# Altium PCB SonarControl.PcbDoc
Units mil, origin at the board's own origin, x right, y up, seen from the top; angles counter-clockwise.
Board outline 1500 x 2220 mil, 2 copper layers (Top Layer, Bottom Layer); 15 components, 0 nets, 85 pads, 18 vias.
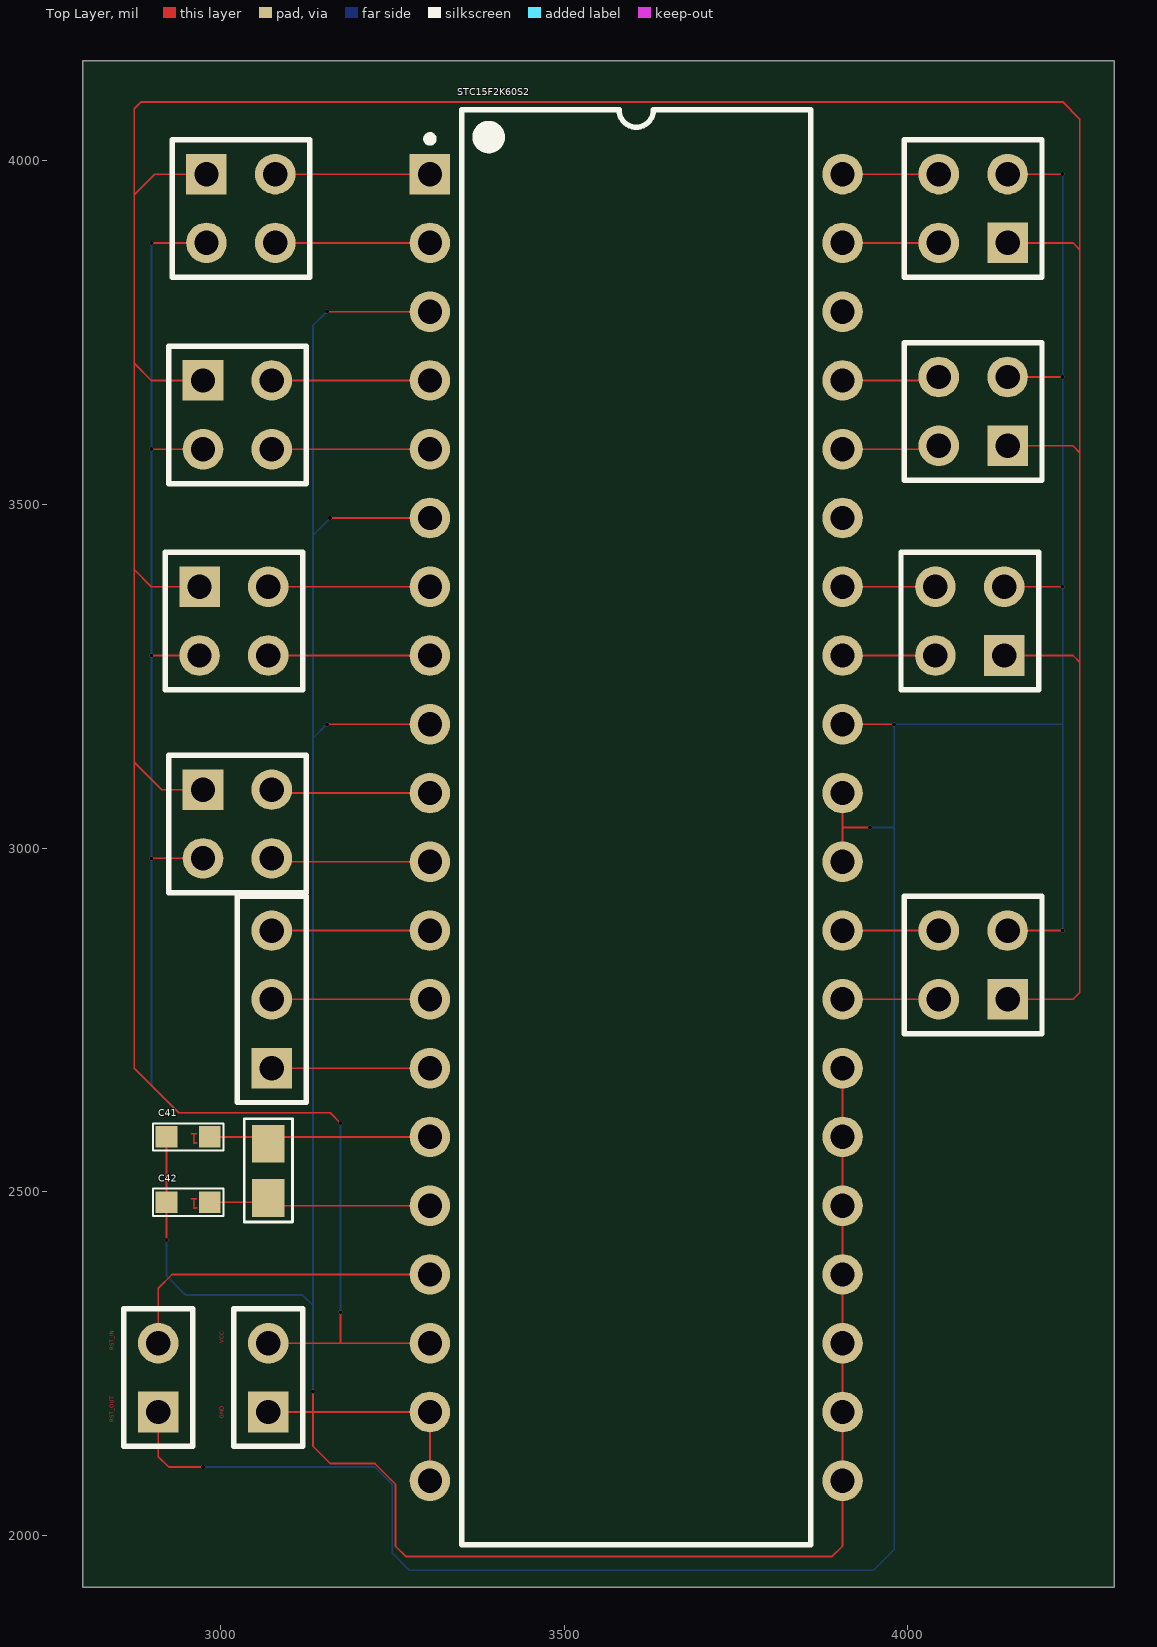
[diagram p0: Top Layer view]
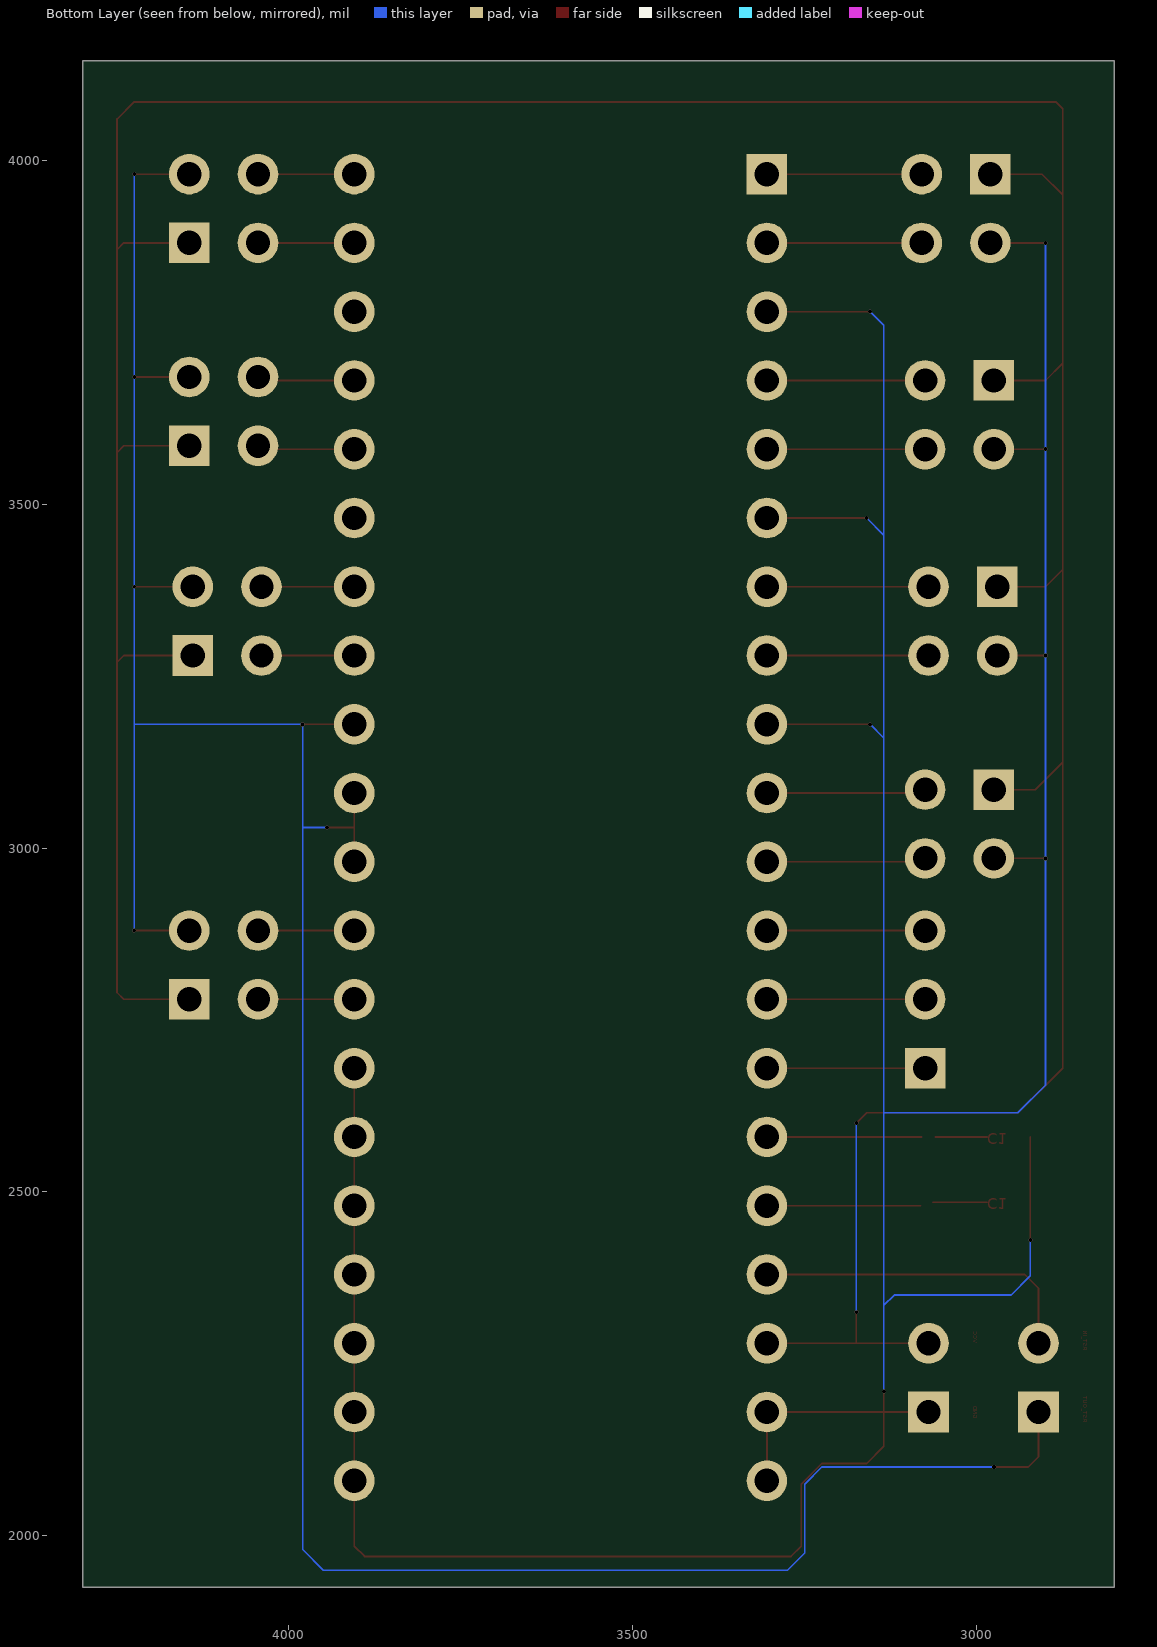
[diagram p1: Bottom Layer view, seen from below]

## Layer stack, top to bottom
Top Solder: solder mask 0.4, Solder Resist, Dk 3.5
Top Layer: signal copper 1.4
Dielectric 1: dielectric 12.6, FR-4, Dk 4.8
Bottom Layer: signal copper 1.4
Bottom Solder: solder mask 0.4, Solder Resist, Dk 3.5

## Board outline
2800,2480 2800,4145 4300,4145 4300,1925 2800,1925

## Design rules (kind name [scope] priority, off if disabled: settings)
Clearance [All] p1: gap=10 ignorepadtopadclearanceinfootprint=FALSE except(0: Arc-Hole Track-Hole SMDPad-Hole THPad-Hole Via-Hole Fill-Hole Poly-Hole Region-Hole Text-Hole)
PolygonConnect [All] p1: connectstyle=Relief reliefconductorwidth=10 reliefentries=4 polygonreliefangle="90 Angle" airgapwidth=10
RoutingVias [All] p1: holewidth=28 width=50 viastyle="Through Hole" minholewidth=28 minwidth=50 maxholewidth=28 maxwidth=50
SolderMaskExpansion [All] p1: expansion=4
Width [All] p1: maxlimit=10 minlimit=10 preferedwidth=10
30 further rules are at their usual default settings.

## Components (designator, comment, footprint, x,y, rotation, side; value= is the part's Value field where it differs from the comment)
C41 "Comment" CAP_0603_FIRE 2985,2580 r180 top
C42 "Comment" CAP_0603_FIRE 2985,2485 r180 top
STC15F2K60S2 "Comment" DIP40 3605,3030 r0 top
? "Comment" HDR2X2 4145,2780 r90 top
? "Comment" HDR2X2 4140,3280 r90 top
? "Comment" HDR2X2 4145,3585 r90 top
? "Comment" HDR2X2 4145,3880 r90 top
? "Comment" HDR2X2 2980,3980 r270 top
? "Comment" HDR2X2 2975,3680 r270 top
? "Comment" HDR2X2 2970,3380 r270 top
? "Comment" HDR2X2 2975,3085 r270 top
? "Comment" HDR1X3 3075,2680 r90 top
? "Comment" 3215 3070,2491.26 r90 top
? "Comment" HDR1X2 2910,2180 r90 top
? "Comment" HDR1X2 3070,2180 r90 top

## Footprints (in the part's own frame and the unit in brackets; to place one, negate y for a bottom-side part, rotate by r counter-clockwise, add the part's x,y. Pads: shape width x height; smd on the part's side, far side on the other; paste and mask are expansions set on the pad)
3215 [mm]
  rect 1.4x1.2 smd: 1(0,0) 2(2,0)
  silkscreen extent -0.89,-0.89 2.92,0.89
CAP_0603_FIRE [mm]
  rect 0.8x0.8 smd: 1(0,0) 2(1.6,0)
  silkscreen extent -0.5,-0.5 2.1,0.5
DIP40 [mm] "DIP, 40-Leads, Row Spacing 15.24mm, Pitch 2.54mm, Body 52.39x13.72mm"
  rect 1.5x1.5 hole 0.9: 1(-7.62,24.13)
  round 1.5 hole 0.9: 2(-7.62,21.59) 3(-7.62,19.05) 4(-7.62,16.51) 5(-7.62,13.97) 6(-7.62,11.43) 7(-7.62,8.89) 8(-7.62,6.35) 9(-7.62,3.81) 10(-7.62,1.27) 11(-7.62,-1.27) 12(-7.62,-3.81) 13(-7.62,-6.35) 14(-7.62,-8.89) 15(-7.62,-11.43) 16(-7.62,-13.97) 17(-7.62,-16.51) 18(-7.62,-19.05) 19(-7.62,-21.59) 20(-7.62,-24.13) 21(7.62,-24.13) 22(7.62,-21.59) 23(7.62,-19.05) 24(7.62,-16.51) 25(7.62,-13.97) 26(7.62,-11.43) 27(7.62,-8.89) 28(7.62,-6.35) 29(7.62,-3.81) 30(7.62,-1.27) 31(7.62,1.27) 32(7.62,3.81) 33(7.62,6.35) 34(7.62,8.89) 35(7.62,11.43) 36(7.62,13.97) 37(7.62,16.51) 38(7.62,19.05) 39(7.62,21.59) 40(7.62,24.13)
  silkscreen extent -7.74,-26.5 6.45,26.5, body extent -7.05,-26.47 7.05,26.47, height 4.92
HDR1X2 [mm] "Connector; Header; 2 Position"
  rect 1.5x1.5 hole 0.9: 1(0,0)
  round 1.5 hole 0.9: 2(2.54,0)
  silkscreen extent -1.27,-1.27 3.81,1.27
HDR1X3 [mm] "Connector; Header; 3 Position"
  rect 1.5x1.5 hole 0.9: 1(0,0)
  round 1.5 hole 0.9: 2(2.54,0) 3(5.08,0)
  silkscreen extent -1.27,-1.27 6.35,1.27
HDR2X2 [mm] "Connector; Header; 2x2 Position"
  rect 1.5x1.5 hole 0.9: 1(0,0)
  round 1.5 hole 0.9: 2(0,2.54) 3(2.54,0) 4(2.54,2.54)
  silkscreen extent -1.27,-1.27 3.81,3.81

## Via types
v1: diameter 5.75, hole 5.75, Top Layer to Bottom Layer, 18 vias

## Nets (pads, with @x,y where several pads share a name; then routed paths per layer and width w, separated by ;. In a path a pad name is that pad's centre, name@x,y a point inside that pad or via, vN(x,y) a via of type N, cw(c..) or ccw(c..) an arc to the next point about the centre after c; other vN are vias at no path point)
pads on no net: ?.1 ?.2 ?.3 ?.4 C41.1 C41.2 C42.1 C42.2 STC15F2K60S2.1 STC15F2K60S2.2 STC15F2K60S2.3 STC15F2K60S2.4 STC15F2K60S2.5 STC15F2K60S2.6 STC15F2K60S2.7 STC15F2K60S2.8 STC15F2K60S2.9 STC15F2K60S2.10 STC15F2K60S2.11 STC15F2K60S2.12 STC15F2K60S2.13 STC15F2K60S2.14 STC15F2K60S2.15 STC15F2K60S2.16 STC15F2K60S2.17 STC15F2K60S2.18 STC15F2K60S2.19 STC15F2K60S2.20 STC15F2K60S2.21 STC15F2K60S2.22 STC15F2K60S2.23 STC15F2K60S2.24 STC15F2K60S2.25 STC15F2K60S2.26 STC15F2K60S2.27 STC15F2K60S2.28 STC15F2K60S2.29 STC15F2K60S2.30 STC15F2K60S2.31 STC15F2K60S2.32 STC15F2K60S2.33 STC15F2K60S2.34 STC15F2K60S2.35 STC15F2K60S2.36 STC15F2K60S2.37 STC15F2K60S2.38 STC15F2K60S2.39 STC15F2K60S2.40
copper on no net: | length 21261.7
  Top Layer w2.51: 2875,3405 2900,3380 2970,3380 ; 2875,3705 2900,3680 2975,3680 ; v1(2900,2985) 2975,2985 ; v1(2900,3280) 2970,3280 ; v1(2900,3580) 2975,3580 ; v1(2900,3880) 2980,3880 ; 2910,2180 2910,2115 2925,2100 v1(2975,2100) ; 2910,2280 2910,2360 2930,2380 3305,2380 ; v1(2922.01,2430) 2922.01,2485 2922.01,2580 ; 2975,3085 2915,3085 2875,3125 ; 2980,3980 2905,3980 2875,3950 ; 2985,2485 3063.74,2485 ; 2985,2580 3060,2580 ; 3070,2180 3305,2180 3305,2080 ; 3070,2280 3305,2280 ; 3070,3280 3305,3280 ; 3070,3380 3305,3380 ; 3075,2680 3305,2680 ; 3075,2780 3305,2780 ; 3075,2880 3305,2880 ; 3075,2985 3080,2980 3305,2980 ; 3075,3580 3305,3580 ; 3075,3680 3305,3680 ; 3080,2580 3305,2580 ; 3080,3080 3305,3080 ; 3080,3880 3305,3880 ; 3080,3980 3305,3980 ; 3081.26,2480 3305,2480 ; v1(3135,2210) 3135,2180 3135,2130 3160,2105 3225,2105 3255,2075 3255,1985 3270,1970 3890,1970 3905,1985 3905,2080 ; v1(3155,3180) 3305,3180 ; v1(3155,3780) 3305,3780 ; v1(3160,3480) 3310,3480 ; 3175,2280 v1(3175,2325) ; v1(3175,2600) 3160,2615 2940,2615 2875,2680 2875,3125 ; 3905,2680 3905,2580 3905,2380 3905,2180 3905,2080 ; 3905,2780 4045,2780 ; 3905,2880 4045,2880 ; 3905,2980 3905,3080 ; 3905,3030 v1(3945,3030) ; 3905,3180 v1(3980,3180) ; 3905,3280 4040,3280 ; 3905,3380 4040,3380 ; 3905,3580 4040,3580 4045,3585 ; 3905,3680 4040,3680 ; 3905,3880 4045,3880 ; 3905,3980 4045,3980 ; 3910,2075 3905,2080 ; 4140,3280 4240,3280 4250,3270 ; 4140,3380 v1(4225,3380) ; 4145,2780 4240,2780 4250,2790 4250,3870 ; 4145,2880 v1(4225,2880) ; 4145,3585 4240,3585 4250,3575 ; 4145,3685 v1(4225,3685) ; 4145,3880 4240,3880 4250,3870 ; 4145,3980 v1(4225,3980) ; 2875,3125 2875,3950 ; 2875,3950 2875,4075 2885,4085 4225,4085 4250,4060 4250,3870
  Bottom Layer w2.51: v1(2900,3880) 2900,3665 v1(2900,3280) v1(2900,2985) 2900,2655 2940,2615 3135,2615 ; v1(2922.01,2430) 2922.01,2377.99 2950,2350 3120,2350 3135,2335 ; v1(2975,2100) 3225,2100 3250,2075 3250,1975 3275,1950 3950,1950 3980,1980 v1(3980,3180) 4225,3180 ; v1(3135,2210) 3135,2335 ; v1(3155,3180) 3135,3160 ; v1(3155,3780) 3135,3760 3135,3455 ; v1(3160,3480) 3135,3455 ; v1(3175,2325) v1(3175,2600) ; v1(3945,3030) 3980,3030 ; v1(4225,2880) v1(4225,3980) ; 3135,2335 3135,3160 ; 3135,3160 3135,3455

## Other copper
Top Layer:
  text "VCC" at 3005,2280 h6 r90
  text "RST_IN" at 2845,2270 h6 r90
  text "GND" at 3005,2170 h6 r90
  text "RST_OUT" at 2845,2165 h6 r90

## Text inside footprints (layer, text, board x,y; h text height)
C41: Top Layer "C1" at 2984.71,2585.63 h15.75 r180
C42: Top Layer "C1" at 2984.71,2490.63 h15.75 r180